# EAGLE board balloon-v07 (EAGLE 7.6.0)
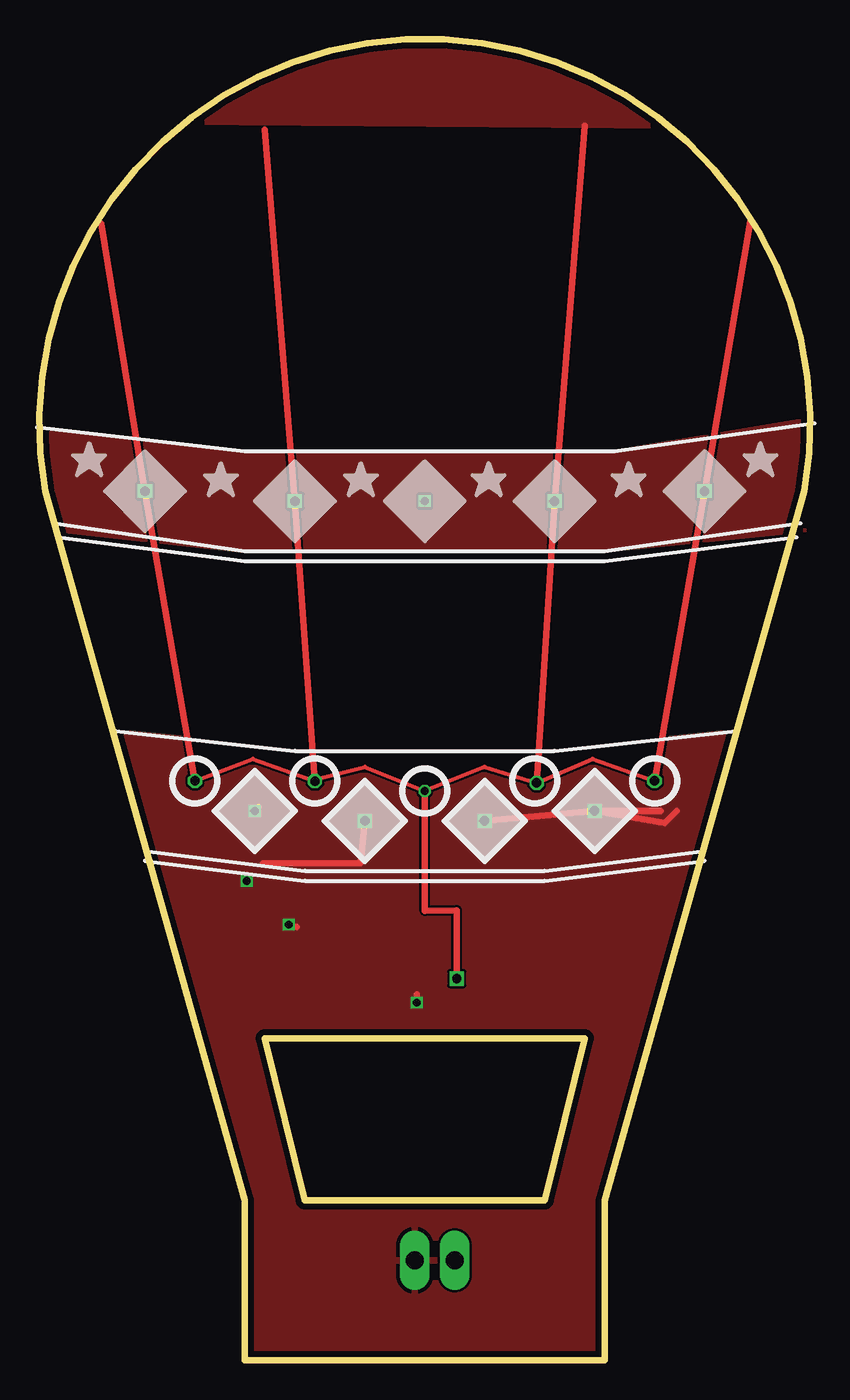
[diagram p0: board, top side]
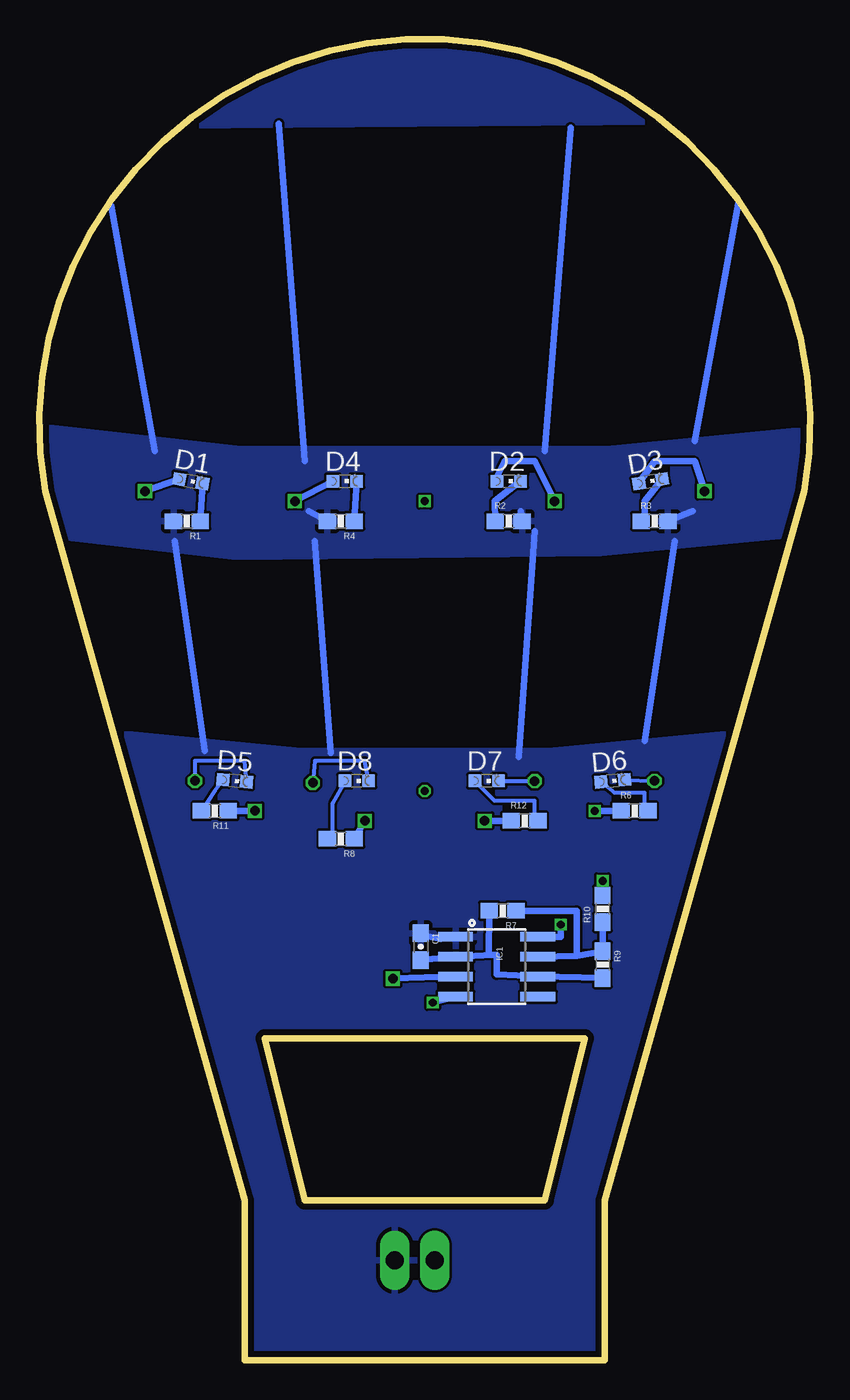
[diagram p1: board, bottom side, seen from below]

Size 48.99 x 83.98 mm. Coordinates in mm from the lower left corner, seen from the top.
Outline: 0.37,55.24 arc-200 48.63,55.24 35.93,10.16 35.93,0 13.07,0 13.07,10.16 0.37,55.24
Outline: 14.34,20.45 16.88,10.16 32.12,10.16 34.66,20.45 14.34,20.45
Copper layers (1*16): Top 0.035559375mm / dielectric 1.6mm / Bottom 0.035559375mm
Design rules "oshpark-2layer": minimum track width 6mil, minimum drill 10mil, track to track 6mil, track to pad 6mil, pad to pad 6mil, via to via 6mil, smd to smd 6mil, copper to edge 15mil, drill to drill 6mil, minimum pad ring 5mil, minimum via ring 5mil, stop-mask expansion 2.5mil, vias tented up to drill 0mil, thermal gap 10mil

## Footprints (pad centres in the part's own frame; a part is rotated, then mirrored left to right if it is on the bottom)
0603-CAP = smd 1.1 x 1: 1 -0.85,0; 2 0.85,0
CHIPLED_0603 = smd 0.8 x 0.8: A 0,-0.75; C 0,0.75
SO08 = smd 0.61 x 2.21: 1 -1.905,-2.616; 2 -0.635,-2.616; 3 0.635,-2.616; 4 1.905,-2.616; 5 1.905,2.616; 6 0.635,2.616; 7 -0.635,2.616; 8 -1.905,2.616
1X02_LONGPADS = drill 1.118 pad 1.88 long: 1 0,0; 2 2.54,0
0603-RES = smd 1.1 x 1: 1 -0.85,0; 2 0.85,0

## Placement (x,y rotation side)
C1  1UF  [0603-CAP]  24.75,26.29 270 bottom
D1  UV-30mA  [CHIPLED_0603]  39.35,55.88 260 bottom
D2  UV-30mA  [CHIPLED_0603]  19.16,55.88 270 bottom
D3  UV-30mA  [CHIPLED_0603]  10.14,55.88 280 bottom
D4  UV-30mA  [CHIPLED_0603]  29.58,55.88 270 bottom
D5  UV-30mA  [CHIPLED_0603]  36.56,36.83 265 bottom
D6  UV-30mA  [CHIPLED_0603]  12.56,36.83 275 bottom
D7  UV-30mA  [CHIPLED_0603]  20.56,36.83 270 bottom
D8  UV-30mA  [CHIPLED_0603]  28.81,36.83 270 bottom
IC1  [SO08]  19.92,25.02 270 bottom
J1  [1X02_LONGPADS]  23.86,6.35 0 top
R1  100  [0603-RES]  39.61,53.34 180 bottom
R2  100  [0603-RES]  19.16,53.34 0 bottom
R3  100  [0603-RES]  9.89,53.34 0 bottom
R4  100  [0603-RES]  29.83,53.34 180 bottom
R6  100  [0603-RES]  11.16,34.92 0 bottom
R7  SET  [0603-RES]  19.54,28.57 180 bottom
R8  100  [0603-RES]  29.83,33.15 180 bottom
R9  1M  [0603-RES]  13.19,25.15 270 bottom
R10  1k  [0603-RES]  13.19,28.7 90 bottom
R11  100  [0603-RES]  37.83,34.92 180 bottom
R12  100  [0603-RES]  18.15,34.29 0 bottom

## Library data of the parts
C1 = SparkFun-Capacitors; DIGIKEY_PART_ID: 1276-1946-1-ND
D1-D8 = led
IC1 = SparkFun-AnalogIC; DIGIKEY_PART_ID: ICM7555CBAZ-TCT-ND
J1 = SparkFun-Connectors
R1-R4 R6 R8 R11 R12 = SparkFun-Resistors; DIGIKEY_PART_ID: P100BZCT-ND
R7 R9 = SparkFun-Resistors; DIGIKEY_PART_ID: P1MBZCT-ND
R10 = SparkFun-Resistors; DIGIKEY_PART_ID: P1KBZCT-ND

## Nets
DISCHARGE: IC1.7 R7.1 R9.1 R10.1
GND: C1.1 IC1.1 J1.2 R1.2 R2.2 R3.2 R4.2
N$1: D8.A R8.2
N$2: D5.A R11.2
N$3: D1.C R1.1
N$4: D7.A R12.2
N$5: D2.C R2.1
N$6: D6.A R6.2
N$7: D3.C R3.1
N$9: D4.C R4.1
OUT: D1.A D2.A D3.A D4.A D5.C D6.C D7.C D8.C IC1.3
THRESHOLD: C1.2 IC1.2 IC1.6 R7.2 R9.2
VCC: IC1.4 IC1.8 J1.1 R6.1 R8.1 R10.2 R11.1 R12.1

## Tracks (layer width: path | path; a pad name or v marks a point on that pad's centre or on a via)
BOTTOM
  pour Bottom: 9.26,78.74 40.75,78.49 31.99,83.06 23.86,84.71 15.48,82.93
DISCHARGE
  Bottom 0.406: R10.1 R9.1 14.83,25.71 | IC1.7 14.83,25.71 | R7.1 14.84,28.57 14.83,25.71
GND
  Bottom 0.406: R3.2 7.48,53.97 | R2.2 18.4,53.97 | R4.2 31.86,53.97 | 23.48,26.8 24.75,27.05 | 38.47,38.73 40.37,52.07 | 30.46,38.61 31.48,52.07 | 18.53,38.35 17.51,52.7 | 10.53,39.37 8.62,52.07 | 7.35,58.42 4.56,73.53 | 16.88,57.78 15.22,78.36 | 32.12,57.15 33.77,78.61 | 41.64,57.78 44.43,73.41
  pour Bottom: -0.14,59.18 12.94,57.91 36.18,57.91 49.77,59.44 48.63,52.45 36.43,51.05 13.32,51.31 1.25,52.45 -0.14,58.8
  pour Bottom: 4.68,39.88 16.62,38.73 32.37,38.73 44.05,39.88 43.55,38.1 37.2,-0.64 11.8,-0.64 4.18,38.1
N$1
  Bottom 0.254: D8.A 30.34,35.43 30.34,33.53 30.59,33.15 R8.2
N$2
  Bottom 0.254: R11.2 37.83,36.2 D5.A
N$3
  Bottom 0.406: R1.1 D1.C
N$4
  Bottom 0.254: R12.2 17.51,34.29 17.51,35.56 20.05,35.56 D7.A
N$5
  Bottom 0.406: R2.1 20.05,54.61 D2.C
N$6
  Bottom 0.254: R6.2 10.53,34.92 10.53,36.07 12.43,36.07 D6.A
N$7
  Bottom 0.406: R3.1 10.53,53.34 10.53,54.61 D3.C
N$8
  pour Top: -0.14,59.05 13.07,57.78 36.69,57.78 48.88,59.82 48.63,52.7 35.93,51.43 12.81,51.43 1.25,52.7
N$9
  Bottom 0.406: R4.1 D4.C
N$10  (via drill 0.5)
  other vias: 24.5,54.61
OUT  (via drill 0.5, 0.6)
  Top 0.254: v9.89,36.83 13.57,38.23 v17.51,36.82 17.64,36.96 20.69,37.72 v24.5,36.2 28.31,37.72 v31.61,36.7 35.16,38.23 v39.1,36.83 | v16.24,54.61 16.24,54.6
  Top 0.406: v17.51,36.82 v16.24,54.61 | v9.89,36.83 v6.72,55.24 3.92,72.26 | v39.1,36.83 v42.28,55.24 45.2,72.39 | v26.53,24.26 26.52,28.6 24.5,28.57 v24.5,36.2 | v31.61,36.7 v32.75,54.61 34.66,78.49 | 16.24,54.6 14.34,78.23
  Bottom 0.254: D6.C v9.89,36.83 | D5.C 35.93,38.1 39.1,38.1 v39.1,36.83 | D8.C 28.31,38.1 31.48,38.1 v31.61,36.7 | D7.C v17.51,36.82 | 20.05,55.88 D2.A
  Bottom 0.406: IC1.3 v26.53,24.26 | v42.28,55.24 D1.A | D4.A v32.75,54.61 | 20.05,55.88 19.42,57.15 17.51,57.15 v16.24,54.61 | v6.72,55.24 7.35,57.15 9.89,57.15 D3.A
  pour Top: 8.75,78.74 40.5,78.49 34.78,82.3 24.11,84.71 15.99,83.19
THRESHOLD
  Bottom 0.406: 20.15,25.77 19.92,25.78 19.92,24.51 IC1.6 R9.2 | 20.15,25.77 IC1.2 C1.2 | 20.15,25.77 20.43,25.78 R7.2
VCC  (via drill 0.5, 0.6)
  Top 0.406: v20.69,34.29 20.43,31.62 14.21,31.58 | v28.31,34.29 v35.29,34.92 | v35.29,34.92 39.48,34.92 | v35.29,34.92 39.74,34.16 40.5,34.92 | v23.99,22.73 23.99,23.24 | v15.86,27.69 16.37,27.56 | v13.7,34.92 13.95,35.18 | v13.19,30.48 13.19,30.86
  Bottom 0.406: R12.1 v20.69,34.29 | R8.1 v28.31,34.29 | R11.1 v35.29,34.92 | IC1.4 v23.99,22.73 | R6.1 v13.7,34.92 | R10.2 v13.19,30.48 | IC1.8 15.86,26.92 v15.86,27.69
  pour Top: 4.18,40 16.88,38.73 30.59,38.48 44.82,40 37.2,0 6.08,0